# Altium PCB sandun_final.PcbDoc
Units mil, origin at the board's own origin, x right, y up, seen from the top; angles counter-clockwise.
Board outline 1395 x 860 mil, 2 copper layers (Top Layer, Bottom Layer); 24 components, 14 nets, 63 pads, 11 vias.
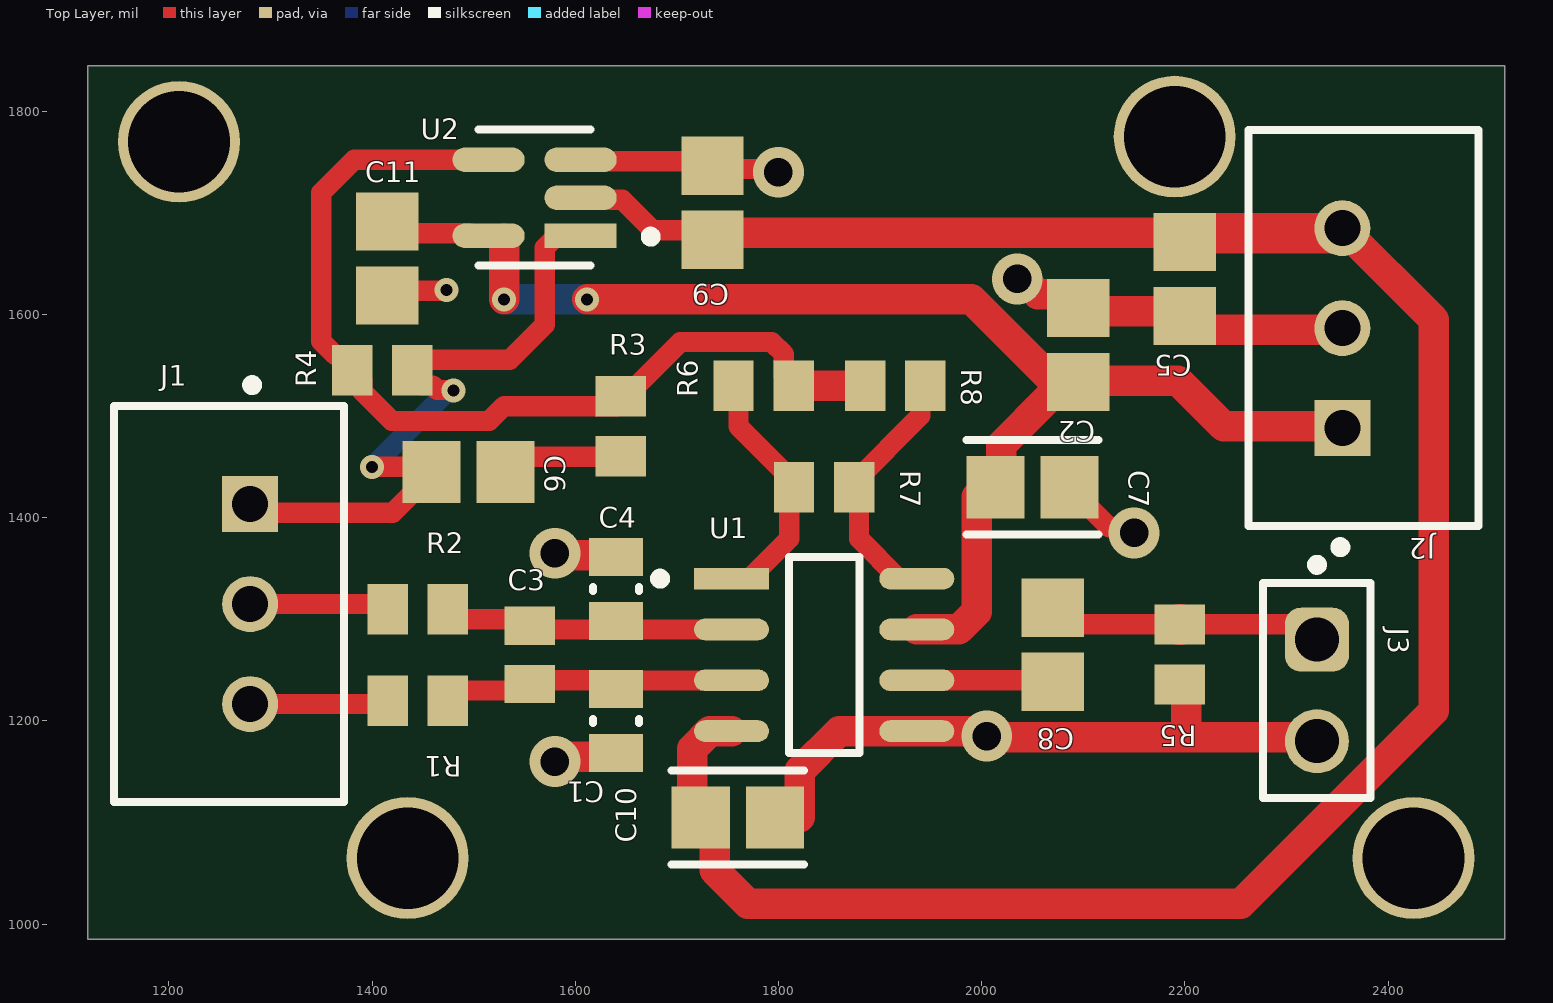
[diagram p0: Top Layer view]
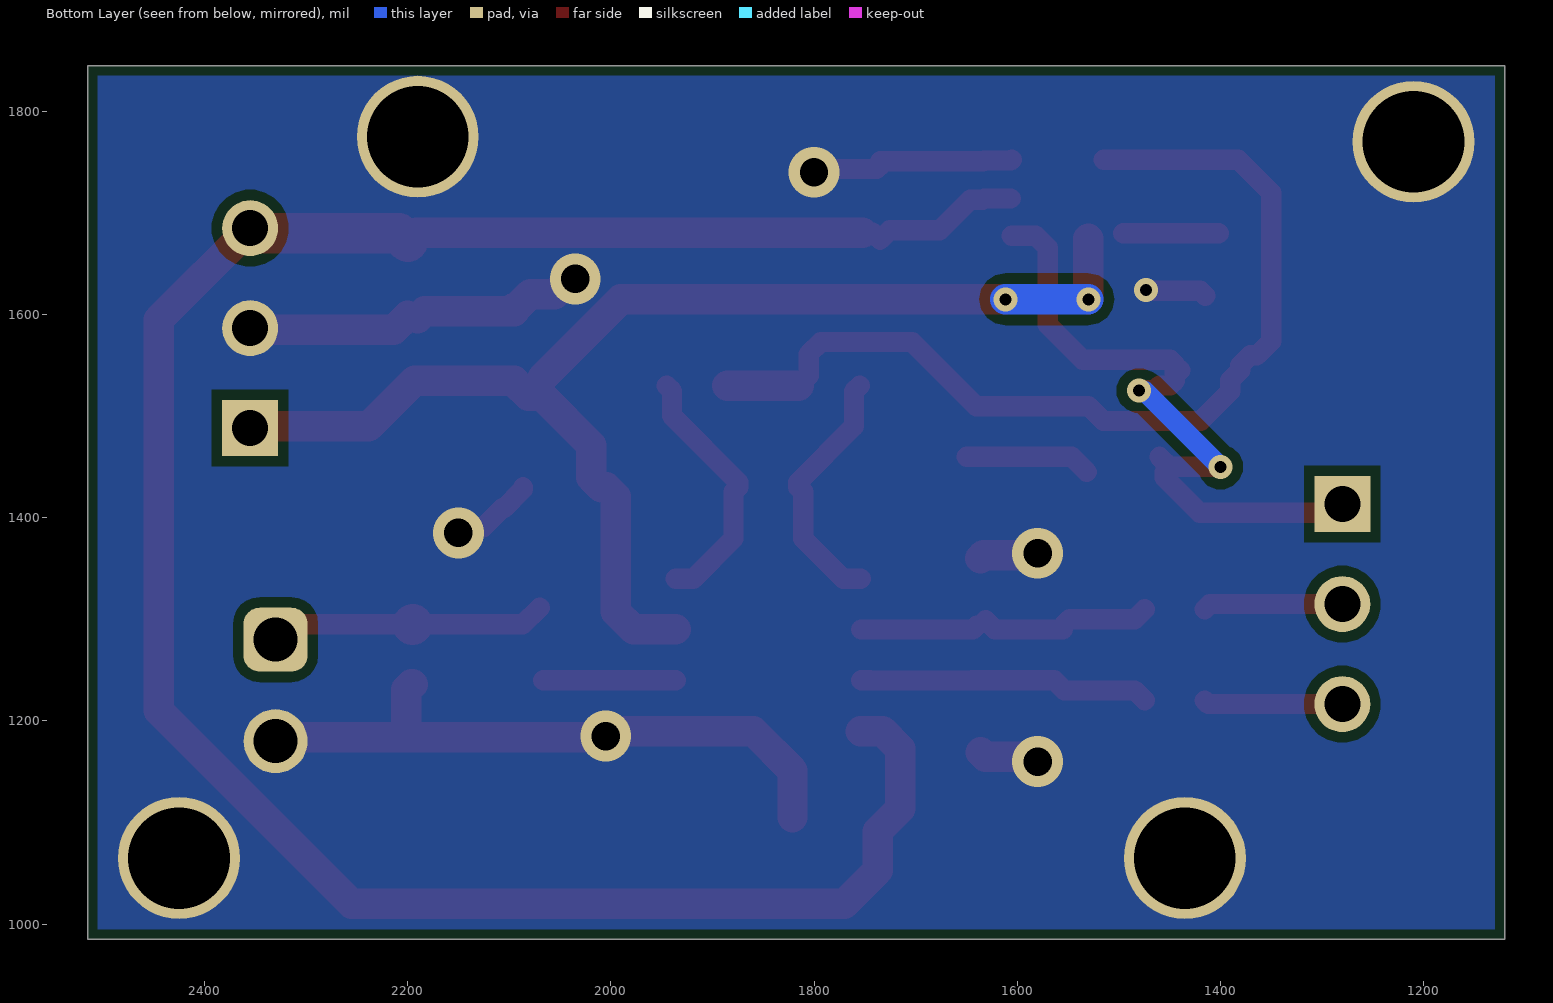
[diagram p1: Bottom Layer view, seen from below]
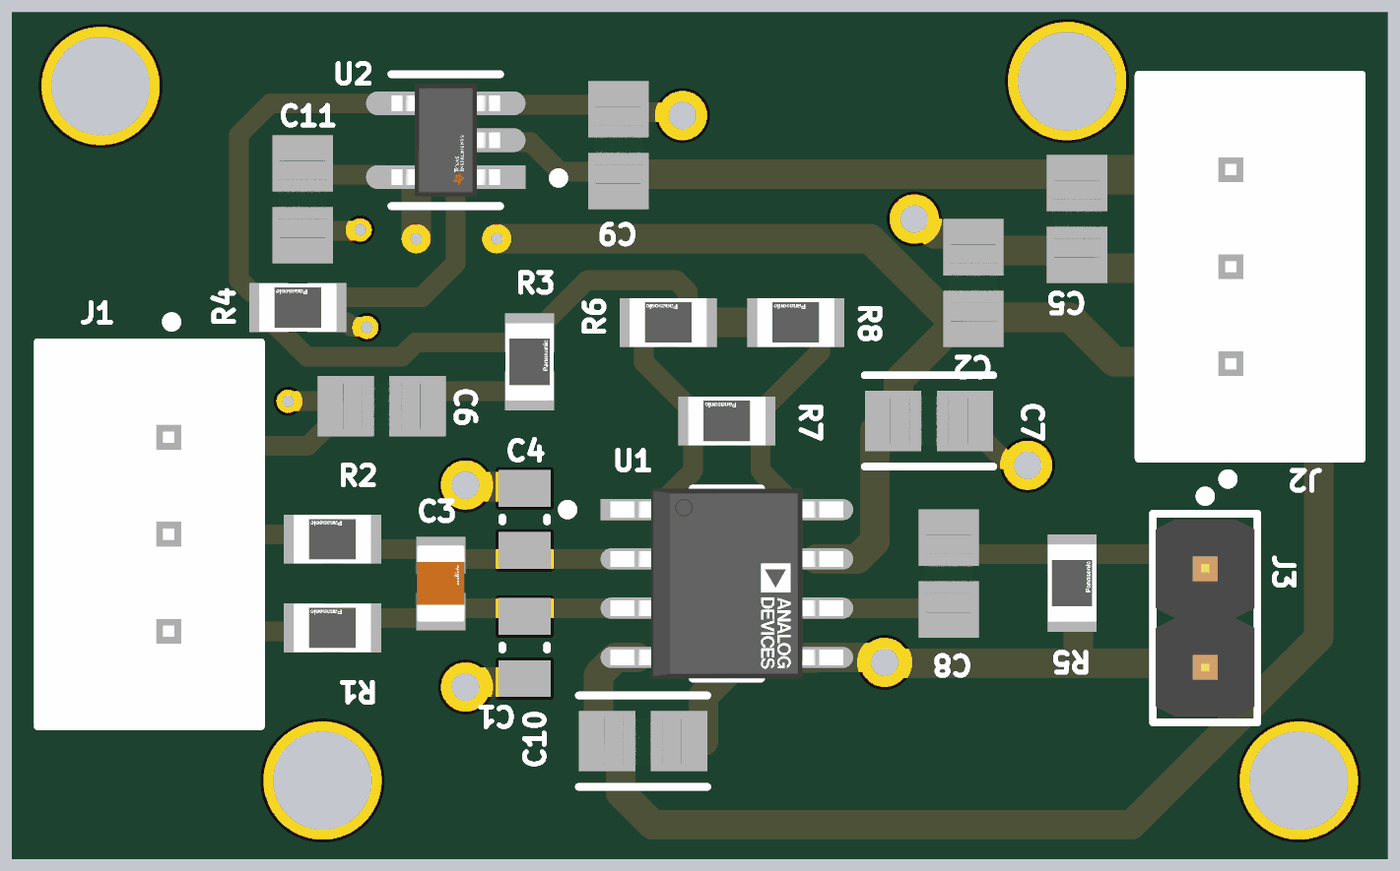
[diagram p2: 3D render of the assembled board from above, using the file's embedded part models]

## Layer stack, top to bottom
Top Solder: solder mask 0.4, Solder Resist, Dk 3.5
Top Layer: signal copper 1.4
Dielectric 1: dielectric 12.6, FR-4, Dk 4.8
Bottom Layer: signal copper 1.4
Bottom Solder: solder mask 0.4, Solder Resist, Dk 3.5

## Board outline
1120,985 2515,985 2515,1845 1120,1845

## Design rules (kind name [scope] priority, off if disabled: settings)
BoardOutlineClearance [All] p1: gap=7.87 ignorepadtopadclearanceinfootprint=FALSE
Clearance Clearance_4 [InNamedPolygon('GND_L02_P001')] p1: gap=10 ignorepadtopadclearanceinfootprint=FALSE
Clearance Clearance_3 [InNamedPolygon('GND_L02_P001')] p2: gap=10 ignorepadtopadclearanceinfootprint=FALSE
Clearance Clearance_2 [InNamedPolygon('GND_L02_P001')] p3: gap=10 ignorepadtopadclearanceinfootprint=FALSE
Clearance [All] p4: gap=5 ignorepadtopadclearanceinfootprint=FALSE except(9.84: Arc-Hole Track-Hole SMDPad-Hole THPad-Hole Via-Hole Fill-Hole Poly-Hole Region-Hole Text-Hole)
ComponentClearance [All] p1: gap=5 collisioncheckmode=3 verticalgap=5 showdistances=TRUE
DiffPairsRouting [All] p1: maxlimit=10 minlimit=5 mostfreqgap=5 toplayer_minwidth=5 toplayer_maxwidth=1000 toplayer_prefwidth=5 bottomlayer_minwidth=5 bottomlayer_maxwidth=1000 bottomlayer_prefwidth=5 maxuncoupledlength=500
Height [All] p1: minheight=0 maxheight=71497.94 prefheight=500
HoleSize [All] p1: absolutevalues=TRUE maxlimit=248.03 minlimit=11.81 maxpercent=80.000 minpercent=20.000
HoleToHoleClearance [All] p1: gap=9.84 allowstackedmicrovias=FALSE
MinimumAnnularRing [All] p1: minimumring=3
MinimumSolderMaskSliver [All] p1: minsoldermaskwidth=0
PlaneClearance [All] p1: clearance=5
PlaneConnect PlaneConnectPowerPads [InPadClass('PowerPads')] p1: planeconnectstyle=Direct reliefexpansion=20 reliefentries=4 reliefconductorwidth=10 reliefairgap=10
PlaneConnect [All] p2: pad.planeconnectstyle=Relief pad.reliefexpansion=11.81 pad.reliefentries=4 pad.reliefconductorwidth=5 pad.reliefairgap=5 via.planeconnectstyle=Direct via.reliefexpansion=11.81 via.reliefentries=4 via.reliefconductorwidth=5 via.reliefairgap=5
PolygonConnect PolygonConnect_4 [All vs IsNamedPolygon('GND_L02_P001')] p1: thpad.connectstyle=Direct thpad.reliefconductorwidth=10 thpad.reliefentries=4 thpad.polygonreliefangle="90 Angle" thpad.airgapwidth=10 smdpad.connectstyle=Relief smdpad.reliefconductorwidth=10 smdpad.reliefentries=4 smdpad.polygonreliefangle="90 Angle" smdpad.airgapwidth=10 via.connectstyle=Direct via.reliefconductorwidth=10 via.reliefentries=4 via.polygonreliefangle="90 Angle" via.airgapwidth=10
PolygonConnect PolygonConnect_3 [All vs IsNamedPolygon('GND_L02_P001')] p2: thpad.connectstyle=Direct thpad.reliefconductorwidth=10 thpad.reliefentries=4 thpad.polygonreliefangle="90 Angle" thpad.airgapwidth=10 smdpad.connectstyle=Direct smdpad.reliefconductorwidth=10 smdpad.reliefentries=4 smdpad.polygonreliefangle="90 Angle" smdpad.airgapwidth=10 via.connectstyle=Relief via.reliefconductorwidth=10 via.reliefentries=4 via.polygonreliefangle="90 Angle" via.airgapwidth=10
PolygonConnect PolygonConnect_2 [All vs IsNamedPolygon('GND_L02_P001')] p3: thpad.connectstyle=Direct thpad.reliefconductorwidth=10 thpad.reliefentries=4 thpad.polygonreliefangle="90 Angle" thpad.airgapwidth=10 smdpad.connectstyle=Relief smdpad.reliefconductorwidth=10 smdpad.reliefentries=4 smdpad.polygonreliefangle="90 Angle" smdpad.airgapwidth=10 via.connectstyle=Relief via.reliefconductorwidth=10 via.reliefentries=4 via.polygonreliefangle="90 Angle" via.airgapwidth=10
PolygonConnect PolygonConnect_1 [All vs IsNamedPolygon('GND_L02_P001')] p4: thpad.connectstyle=Relief thpad.reliefconductorwidth=50 thpad.reliefentries=4 thpad.polygonreliefangle="90 Angle" thpad.airgapwidth=10 smdpad.connectstyle=Relief smdpad.reliefconductorwidth=10 smdpad.reliefentries=4 smdpad.polygonreliefangle="90 Angle" smdpad.airgapwidth=10 via.connectstyle=Relief via.reliefconductorwidth=10 via.reliefentries=4 via.polygonreliefangle="90 Angle" via.airgapwidth=10
PolygonConnect PolygonConnectPowerPads [All vs (InPadClass('PowerPads'))] p5: connectstyle=Direct reliefconductorwidth=10 reliefentries=4 polygonreliefangle="90 Angle" airgapwidth=10
PolygonConnect [All] p6: thpad.connectstyle=Relief thpad.reliefconductorwidth=5 thpad.reliefentries=4 thpad.polygonreliefangle="90 Angle" thpad.airgapwidth=5 smdpad.connectstyle=Relief smdpad.reliefconductorwidth=5 smdpad.reliefentries=4 smdpad.polygonreliefangle="90 Angle" smdpad.airgapwidth=5 via.connectstyle=Direct via.reliefconductorwidth=5 via.reliefentries=4 via.polygonreliefangle="90 Angle" via.airgapwidth=5
RoutingVias [All] p1: holewidth=11.81 width=23.62 viastyle="Through Hole" minholewidth=11.81 minwidth=23.62 maxholewidth=23.62 maxwidth=259.84
SilkToSilkClearance [All] p1: silktosilkclearance=0
SilkToSolderMaskClearance [IsPad] p1: minsilkscreentomaskgap=5 clearancetoexposedcopper=TRUE
SolderMaskExpansion [All] p1: expansion=2.95 istentingtop=FALSE
Width [All] p1: maxlimit=1000 minlimit=5 preferedwidth=5 minimp=50.000000 maximp=50.000000 favimp=50.000000
20 further rules are at their usual default settings.

## Components (designator, comment, footprint, x,y, rotation, side; value= is the part's Value field where it differs from the comment)
C1 "1nF" CAPC0805(2012)145_L 1640,1200 r270 top
C2 "0.1uF" FP-CL21-IPC_A 2095,1570 r90 top
C3 "47nF" FP-GRM21B-0_1-IPC_C 1555,1265 r90 top
C4 "1nF" CAPC0805(2012)145_L 1640,1330 r270 top
C5 "0.1uF" FP-CL21-IPC_A 2200,1635 r270 top
C6 "0.1uF" FP-CL21-IPC_A 1495,1445 r0 top
C7 "CL21B104MACNNNC" FP-CL21-IPC_A 2050,1430 r0 top
C8 "0.1uF" FP-CL21-IPC_A 2070,1275 r90 top
C9 "0.1uF" FP-CL21-IPC_A 1735,1710 r90 top
C10 "CL21B104MACNNNC" FP-CL21-IPC_A 1760,1105 r0 top
C11 "0.1uF" FP-CL21-IPC_A 1415,1655 r90 top
J1 "B3B-XH-A(LF)(SN)" FP-B3B-XH-A_LF_SN-MFG 1259.33,1315 r270 top
J2 "B3B-XH-A(LF)(SN)" FP-B3B-XH-A_LF_SN-MFG 2375.67,1586.57 r90 top
J3 "61300211121" 61300211121 2330,1230 r270 top
R1 "4k" FP-ERA6A-IPC_C 1445,1220 r180 top
R2 "4k" FP-ERA6A-IPC_C 1445,1310 r180 top
R3 "10k" FP-ERA6A-IPC_C 1645,1490 r90 top
R4 "1M" FP-ERA6A-IPC_C 1410,1545 r180 top
R5 "1M ?" FP-ERA6A-IPC_C 2195,1265.44 r90 top
R6 "10k" FP-ERA6A-IPC_C 1785.44,1530 r180 top
R7 "100" FP-ERA6A-IPC_C 1845,1430 r180 top
R8 "10k" FP-ERA6A-IPC_C 1915,1530 r180 top
U1 "AD620BRZ-R7" FP-R-8-IPC_C 1845,1265 r0 top
U2 "TLV9151IDBVR" FP-DBV0005A-IPC_A 1560,1715 r180 top

## Footprints (in the part's own frame and the unit in brackets; to place one, negate y for a bottom-side part, rotate by r counter-clockwise, add the part's x,y. Pads: shape width x height; smd on the part's side, far side on the other; paste and mask are expansions set on the pad)
61300211121 [mm] "Pin Header, pitch 2.54 mm, THT, Vertical, single row, 2p"
  rrect50% 1.6x1.6 hole 1.1: 1(-1.27,0)
  round 1.6 hole 1.1: 2(1.27,0)
  silkscreen extent -3.26,-1.35 2.69,1.35, body extent -2.54,-1.27 2.54,1.27, height 8.57
CAPC0805(2012)145_L [mm] "Chip Capacitor, Body 2.0x1.2mm, Height 1.45mm, IPC High Density"
  rect 0.95x1.35 smd: 1(-0.8,0) 2(0.8,0)
  silkscreen extent -0.05,-0.58 0.05,0.58, body extent -1.1,-0.72 1.1,0.72, height 1.45
FP-B3B-XH-A_LF_SN-MFG [mm]
  rect 1.4x1.4 hole 0.9 paste-2539.97 mask+0: 1(-2.5,0.525)
  round 1.4 hole 0.9 paste-2539.97 mask+0: 2(0,0.525) 3(2.5,0.525)
  silkscreen extent -5.6,-2.88 4.95,2.88, body extent -5.05,-2.98 5.05,2.98, height 0.25
FP-CL21-IPC_A [mil]
  rect 57.27x61.27 smd paste+0 mask+0: 1(-36.45,0) 2(36.45,0)
  body extent -39,-25 39,25, height 57
FP-DBV0005A-IPC_A [mm]
  rect 1.805x0.612 smd paste+0 mask+0: 1(-1.15,0.95)
  rrect100% 1.805x0.612 smd paste+0 mask+0: 2(-1.15,0) 3(-1.15,-0.95) 4(1.15,-0.95) 5(1.15,0.95)
  silkscreen extent -3.03,-1.7 1.4,1.7, body extent -1.4,-1.45 1.4,1.45, height 1.45
FP-ERA6A-IPC_C [mil]
  rect 39.55x49.69 smd paste+0 mask+0: 1(-29.56,0) 2(29.56,0)
  body extent -53,-31 53,31, height 10
FP-GRM21B-0_1-IPC_C [mil]
  rect 37.71x49.69 smd paste+0 mask+0: 1(-28.63,0) 2(28.63,0)
  body extent -51,-31 51,31, height 10
FP-R-8-IPC_C [mil]
  rect 73.78x21.34 smd paste+0 mask+0: 1(-91.18,75)
  rrect100% 73.78x21.34 smd paste+0 mask+0: 2(-91.18,25) 3(-91.18,-25) 4(-91.18,-75) 5(91.18,-75) 6(91.18,-25) 7(91.18,25) 8(91.18,75)
  silkscreen extent -166,-96 35,96, body extent -132,-100 132,100, height 10

## Part data
C1 C4: library part CMP-1036-02976-1, "CAP 1nF 50V ±5% 0805 (2012 Metric) Thickness 1.45mm SMD", Case-EIA=0805, Case-Metric=2012, Rated Voltage="50 V", Tolerance=Â±5%, Max Thickness="1.45 mm", Technology=SMT
C2 C5 C6 C8 C9 C11: library part CMP-13271-004391-1, "CL21 Series 0805 100nF 25V ±20% Tolerance X7R Multilayer Ceramic Chip Capacitor, CL21B104MACNNNC", Capacitance=100nF, Case Code (Imperial)=0805, Case Code (Metric)=2012, Dielectric=X7R, Max Operating Temperature=125°C, Min Operating Temperature=-55°C, Package Quantity=1, Tolerance=20%, Voltage Rating=25V, Case/Package=0805, Construction=Flat, Depth=1.25mm, Height=0.85mm, Lead Free="Lead Free", Length=2mm, Mount="Surface Mount", Packaging="Tape and Reel", Radiation Hardening=No, RoHS Compliant=Yes, Series=CL, Thickness=0.037inch, Voltage Rating (DC)=25V, Width=0.049inch
C3: library part CMP-06035-029151-1, "Chip Multilayer Ceramic Capacitors for General Purpose, 0805, 47000pF, SL, +350/-1000ppm/°C, 5%, 50V,   GRM21B1X1H473JA01L", Case Code (Imperial)=0805, Case Code (Metric)=2012, Max Operating Temperature=125°C, Min Operating Temperature=-55°C, Tolerance=5%, Voltage Rating=50V, Capacitance=47nF, Case/Package=0805, Lead Free="Lead Free", Length=0.079inch, Mount="Surface Mount", Packaging="Tape and Reel", Termination=SMD/SMT, Thickness=0.053inch, Voltage Rating (DC)=50V, Width=0.049inch
C7 C10: library part CMP-13271-004391-1, "CL21 Series 0805 100nF 25V ±20% Tolerance X7R Multilayer Ceramic Chip Capacitor", Capacitance=100nF, Case Code (Imperial)=0805, Case Code (Metric)=2012, Dielectric=X7R, Max Operating Temperature=125°C, Min Operating Temperature=-55°C, Package Quantity=1, Tolerance=20%, Voltage Rating=25V, Case/Package=0805, Construction=Flat, Depth=1.25mm, Height=0.85mm, Lead Free="Lead Free", Length=2mm, Mount="Surface Mount", Packaging="Tape and Reel", Radiation Hardening=No, RoHS Compliant=Yes, Series=CL, Thickness=0.037inch, Voltage Rating (DC)=25V, Width=0.049inch
J1 J2: library part CMP-17439-000014-3, "CONN HEADER VERT 3POS 2.5MM", Color=Natural, Contact Resistance=20mR, Current Rating=3A, Flammability Rating="UL94 V-0", Housing Color=White, Insulation Resistance=1GR, Max Operating Temperature=85°C, Max Voltage Rating (AC)=250V, Min Operating Temperature=-25°C, Connector Type=Header, Contact Finish - Mating=TIN, Contact Material=Brass, Contact Plating=Tin, Contact Shape=Square, Contact Type="Male Pin", Depth=5.75mm, Fastening Type=Detent, Gender=Male, Housing Material=Polyamide, Insulation Color=Natural, Insulation Material=Nylon, Lead Free="Lead Free", Lead Pitch=2.5mm, Length=9.9mm, Max Current Rating=3A, Max Voltage Rating (DC)=250V, Mount="Through Hole", Number of Contacts=3, Number of Positions=3, Number of Rows=1, Orientation=Straight, Packaging=Bulk, Pitch=2.5mm, REACH SVHC="No SVHC", Series=XH, Termination=Solder, Voltage Rating=250V, Voltage Rating (AC)=250V, Wire/Cable Gauge=22AWG
J3: library part CMP-1712-00002-6, Color=Black, Contact Resistance=20mΩ, Current Rating=3A, Max Operating Temperature=125°C, Min Operating Temperature=-40°C, Operating Supply Voltage=250V, Connector Type="Male Pin", Contact Gender=Male, Contact Material=Copper, Contact Mating Length=5.9944mm, Contact Plating=Gold, Gender=Male, Height=8.94mm, Housing Material=PBT, Lead Free="Lead Free", Lead Pitch=2.54mm, Mount="Through Hole", NexarPartId=20081794, Number of Contacts=2, Number of Pins=2, Number of Positions=2, Number of Rows=1, Orientation=Vertical, Packaging=Bulk, Pitch=2.54mm, REACH SVHC="No SVHC", RoHS=Compliant, Termination="Through Hole", Voltage Rating=250V
R1 R2 R4 R5 R7 R8: library part CMP-2001-00581-2, "RES 1K OHM 0.1% 1/8W 0805,  ERA6AEB102V", Case Code (Imperial)=0805, Case Code (Metric)=2012, Max Operating Temperature=155°C, Max Power Dissipation=125mW, Min Operating Temperature=-55°C, Package Quantity=5000, Resistance=1kR, Resistance Tolerance=0.1%, Resistor Type="Thin Film", Temperature Coefficient=25ppm/°C, Voltage Rating=100V, Case/Package=0805, Construction=Rectangular, Contact Plating=Tin, Depth=1.25mm, Height=0.5mm, Length=2mm, Military Standard=Not, Mount="Surface Mount", Number of Pins=2, Number of Terminations=2, Packaging="Tape and Reel", Power Rating=125mW, Radiation Hardening=No, REACH SVHC="No SVHC", RoHS Compliant=Yes, Series=ERA-6A, Technology="THIN FILM", Termination=SMD/SMT, Tolerance=0.1%, Width=1.25mm, Working Voltage=100V
R3: library part CMP-2001-00581-2, "RES 1K OHM 0.1% 1/8W 0805,   ERA6AEB102V", Case Code (Imperial)=0805, Case Code (Metric)=2012, Max Operating Temperature=155°C, Max Power Dissipation=125mW, Min Operating Temperature=-55°C, Package Quantity=5000, Resistance=1kR, Resistance Tolerance=0.1%, Resistor Type="Thin Film", Temperature Coefficient=25ppm/°C, Voltage Rating=100V, Case/Package=0805, Construction=Rectangular, Contact Plating=Tin, Depth=1.25mm, Height=0.5mm, Length=2mm, Military Standard=Not, Mount="Surface Mount", Number of Pins=2, Number of Terminations=2, Packaging="Tape and Reel", Power Rating=125mW, Radiation Hardening=No, REACH SVHC="No SVHC", RoHS Compliant=Yes, Series=ERA-6A, Technology="THIN FILM", Termination=SMD/SMT, Tolerance=0.1%, Width=1.25mm, Working Voltage=100V
R6: library part CMP-2001-00581-2, "RES 1K OHM 0.1% 1/8W 0805,    ERA6AEB102V", Case Code (Imperial)=0805, Case Code (Metric)=2012, Max Operating Temperature=155°C, Max Power Dissipation=125mW, Min Operating Temperature=-55°C, Package Quantity=5000, Resistance=1kR, Resistance Tolerance=0.1%, Resistor Type="Thin Film", Temperature Coefficient=25ppm/°C, Voltage Rating=100V, Case/Package=0805, Construction=Rectangular, Contact Plating=Tin, Depth=1.25mm, Height=0.5mm, Length=2mm, Military Standard=Not, Mount="Surface Mount", Number of Pins=2, Number of Terminations=2, Packaging="Tape and Reel", Power Rating=125mW, Radiation Hardening=No, REACH SVHC="No SVHC", RoHS Compliant=Yes, Series=ERA-6A, Technology="THIN FILM", Termination=SMD/SMT, Tolerance=0.1%, Width=1.25mm, Working Voltage=100V
U1: library part CMP-09116-000394-1, "IC INST AMP 1 CIRCUIT 8SOIC", Case/Package=SOIC, Input Bias Current=1nA, Input Offset Voltage (Vos)=30mV, Input Resistance=10GR, Max Dual Supply Voltage=18V, Max Operating Temperature=125°C, Max Power Dissipation=650mW, Min Dual Supply Voltage=2.3V, Min Operating Temperature=-55°C, Min Supply Voltage=4.6V, Nominal Supply Current=1.3mA, Output Current per Channel=18mA, Package Quantity=1, -3db Bandwidth=1MHz, Amplifier Type="INSTRUMENTATION AMPLIFIER", Common Mode Rejection Ratio=93dB, Contact Plating=Tin, Lead Free="Contains Lead", Mount="Surface Mount", Number of Channels=1, Number of Circuits=1, Number of Elements=1, Number of Pins=8, Operating Supply Current=1.3mA, Operating Supply Voltage=18V, Packaging="Tape and Reel", Power Dissipation=650mW, Radiation Hardening=No, RoHS Compliant=Yes, Series=-, Slew Rate=1.2V/µs
U2: library part CMP-04895-000336-1, "OPAMP"

## Free pads (board coordinates)
  round 120 hole 100: 1(1210,1770) 2(2190,1775) 3(1435,1065) 4(2425,1065)

## Via types
v1: diameter 50, hole 28, Top Layer to Bottom Layer, 6 vias
v2: diameter 23.62, hole 11.81, Top Layer to Bottom Layer, 5 vias

## Nets (pads, with @x,y where several pads share a name; then routed paths per layer and width w, separated by ;. In a path a pad name is that pad's centre, name@x,y a point inside that pad or via, vN(x,y) a via of type N, cw(c..) or ccw(c..) an arc to the next point about the centre after c; other vN are vias at no path point)
+5: C2.1 C7.1 C11.2 J2.1 U1.7 U2.5 | length 1349.4
  Top Layer w20: C11.2@1401.45,1680 U2.5@1495.54,1680
  Top Layer w30: v2(1530,1615) U2.5@1530,1674.65 ; v2(1611.64,1615) 1990,1615 C2.1@2067.01,1537.99 ; U1.7 1977.43,1290 1995,1307.57 1995,1420.39 2004.61,1430 2009.65,1430 2019.25,1439.61 2019.25,1471.44 2067.73,1519.92 2081.37,1519.92 C2.1 ; C2.1@2095,1535 2193.08,1535 2238.08,1490 J2.1@2358.66,1490
  Bottom Layer w30: v2(1530,1615) v2(1611.64,1615)
-5: C5.1 C9.1 C10.1 J2.3 U1.4 U2.2 | length 2264.9
  Top Layer w20: U2.2@1606.41,1714.22 1632.46,1714.22 1633.72,1712.96 1646.21,1712.96 1676.21,1682.97 1725.59,1682.97 C9.1 1741.91,1680.46 C9.1@1752.27,1680.46
  Top Layer w30: C9.1@1752.27,1680.46 2190.99,1680.46 C5.1 ; U1.4 1732.57,1190 1715,1172.43 1715,1113.55 1737.19,1091.37 1737.19,1052.81 1770,1020 2255,1020 2445,1210 2445,1595 J2.3
  Top Layer w40: C5.1 2208.63,1680.08 2345.99,1680.08 2350.91,1685 J2.3
GND: C1.2 C2.2 C4.1 C5.2 C7.2 C9.2 C10.2 C11.1 J2.2 J3.2 pad.1 pad.2 pad.3 pad.4 R5.1 U1.5 U2.3 | length 1403.6
  Top Layer w20: C11.1 1419.68,1623.23 1472.46,1623.23 v2(1473.15,1623.93) ; U2.3 1606.08,1751.62 1632.46,1751.62 1633.18,1750.9 C9.2@1735,1750.9 ; C9.2 1738.22,1743.22 1796.78,1743.22 v1(1800,1740) ; C7.2 2086.45,1428 2105.08,1409.37 2107.08,1409.37 2125.71,1390.74 2144.26,1390.74 v1(2150,1385)
  Top Layer w30: v1(1580,1160) 1585.41,1160 1590.22,1164.8 1631.3,1164.8 C1.2@1635.75,1169.25 ; v1(1580,1365) 1581.75,1363.25 1633.25,1363.25 C4.1@1636.3,1360.2 ; C10.2@1821.18,1105 1821.18,1151.18 1859.74,1189.74 U1.5@1935.93,1189.74 ; U1.5 1994.59,1190 1999.59,1185 v1(2005,1185) 2006.19,1183.81 2195,1183.81 ; v1(2035,1635) 2040.41,1635 2055.33,1620.08 2079.37,1620.08 2093,1606.45 C2.2 ; C2.2@2095,1603.22 2183.22,1603.22 C5.2@2190,1596.45 ; 2195,1185 2196.19,1183.81 2201.19,1183.81 ; R5.1 2196.41,1235.88 2201.19,1231.11 2201.19,1183.81 ; C5.2 2213.55,1585 J2.2@2349.78,1585 ; J3.2@2319.76,1183.81 2201.19,1183.81
In1: C1.1 C3.1 R1.1 U1.3 | length 287.9
  Top Layer w20: R1.1 1474.56,1220.22 1484.33,1230 1553.63,1230 1563.63,1240 1644.49,1240 1644.74,1239.74 1744.74,1239.74 1745,1240 U1.3
In2: C3.2 C4.2 R2.1 U1.2 | length 282.4
  Top Layer w20: R2.1 1474.56,1309.78 1484.33,1300 1548.63,1300 C3.2 ; C3.2@1555,1290 1622.13,1290 C4.2@1631.06,1298.94 ; C4.2@1640,1293.5 1643.5,1290 U1.2
LA: J1.2 R2.2 | length 137.5
  Top Layer w20: J1.2 1410.44,1315 R2.2
NetC6_2: C6.2 R3.1 | length 124.8
  Top Layer w20: C6.2 1546.45,1460 R3.1@1650,1460
NetC8_1: C8.1 U1.6 | length 130.4
  Top Layer w20: U1.6 C8.1@2066.55,1240
NetR6_2: R6.2 R7.2 U1.1 | length 244.5
  Top Layer w20: U1.1 1771.38,1340 1810.67,1379.29 R7.2@1810.67,1425.67 ; R6.2@1755,1530 1760.66,1524.34 1760.66,1489.85 1815.44,1435.07 R7.2
NetR7_1: R7.1 R8.1 U1.8 | length 248.7
  Top Layer w20: R7.1 1874.56,1435.07 1939.78,1500.29 1939.78,1524.78 R8.1@1945,1530 ; R7.1@1879.33,1425.67 1879.33,1379.29 1918.62,1340 U1.8
output: C8.2 J3.1 R5.2 | length 278.3
  Top Layer w20: C8.2 2086.45,1295 R5.2 2320,1295 J3.1@2335,1280
  Top Layer w40: R5.2 R5.2@2195.22,1294.78
RA: J1.3 R1.2 | length 136.9
  Top Layer w20: J1.3 1412.02,1216.57 R1.2
RLD: C6.1 J1.1 R4.1 U2.1 | length 687.2
  Top Layer w20: J1.1@1280,1405 1420.55,1405 1455,1439.45 C6.1@1455,1445 ; v2(1400,1450) 1450,1450 C6.1@1460,1460 ; R4.1 R4.1@1445,1545 ; v2(1480,1525) 1479.31,1525.69 1464.31,1525.69 1459.85,1530.15 1449.33,1530.15 1445,1534.49 R4.1@1445,1545 ; U2.1 1581.81,1677.6 1570,1665.79 1570,1590 1535.51,1555.51 1449.33,1555.51 1445,1551.18 R4.1@1445,1545
  Bottom Layer w20: v2@1400.69,1450.69 1474.31,1524.31 1479.31,1524.31 v2(1480,1525)
RLi: R3.2 R4.2 R6.1 R8.2 U2.4 | length 964.1
  Top Layer w20: U2.4 1382.4,1752.4 1350,1720 1350,1573.83 1363.98,1559.85 1370.67,1559.85 1380.44,1550.07 R4.2 1390.22,1535.22 1390.22,1524.26 1419.29,1495.19 1515.19,1495.19 1529.78,1509.78 1640.29,1509.78 1703.36,1572.85 1793.51,1572.85 1805.22,1561.13 1805.22,1539.78 R6.1
  Top Layer w30: R6.1 R8.2

## Polygon pours and split planes (outlines as drawn)
GND on Bottom Layer "GND_L02_P001" (solid, pour order 1): 1130,1835 2505,1835 2505,995 1130,995

## Silkscreen, mask and mechanical layers (free items; w line width, h text height)
Mechanical 1:
  the board outline again, w10